# Altium PCB Keypadmacro.PcbDoc
Units mm, origin at the board's own origin, x right, y up, seen from the top; angles counter-clockwise.
Board outline 70 x 90 mm, 2 copper layers (F.Cu, B.Cu), stack 1.813 mm thick; 79 components, 70 nets, 291 pads, 67 vias.
Unrouted connection lines stored in the file: 94.
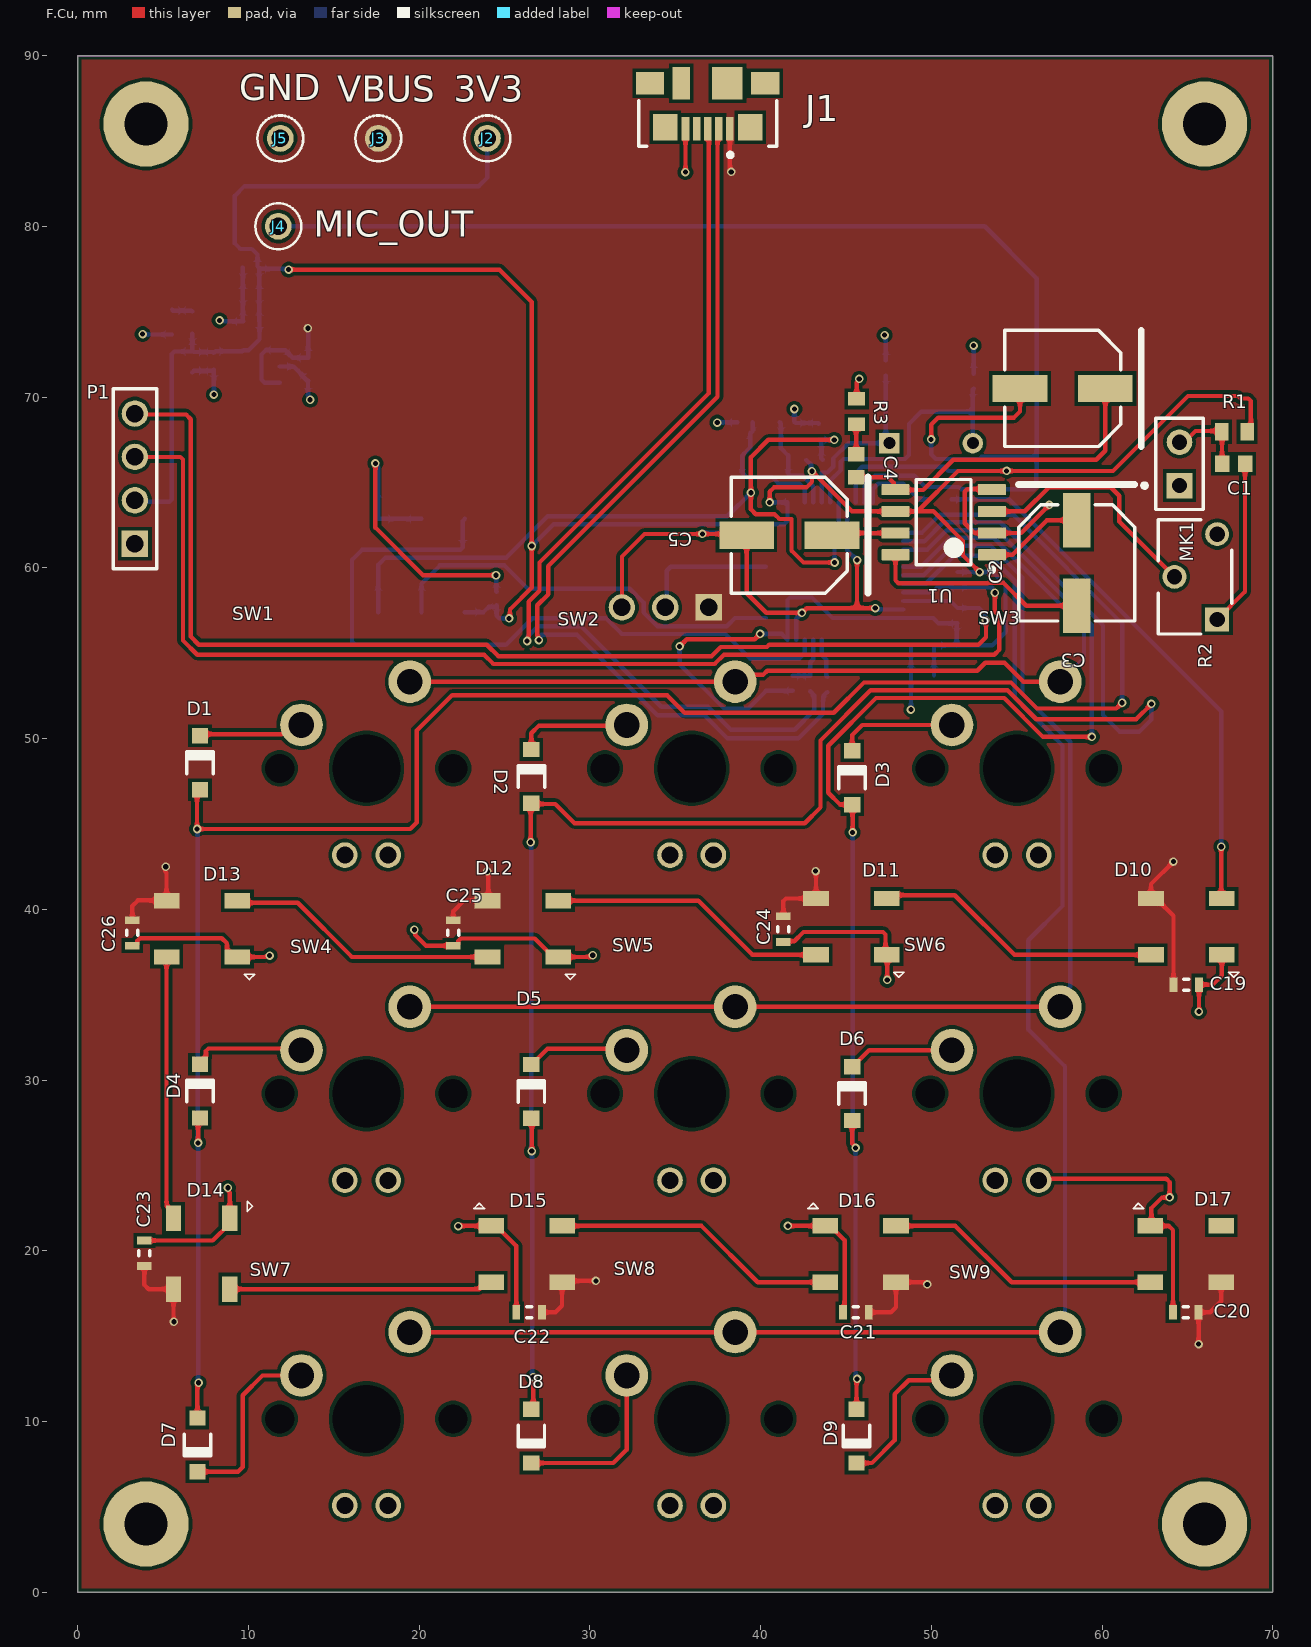
[diagram p0: F.Cu view]
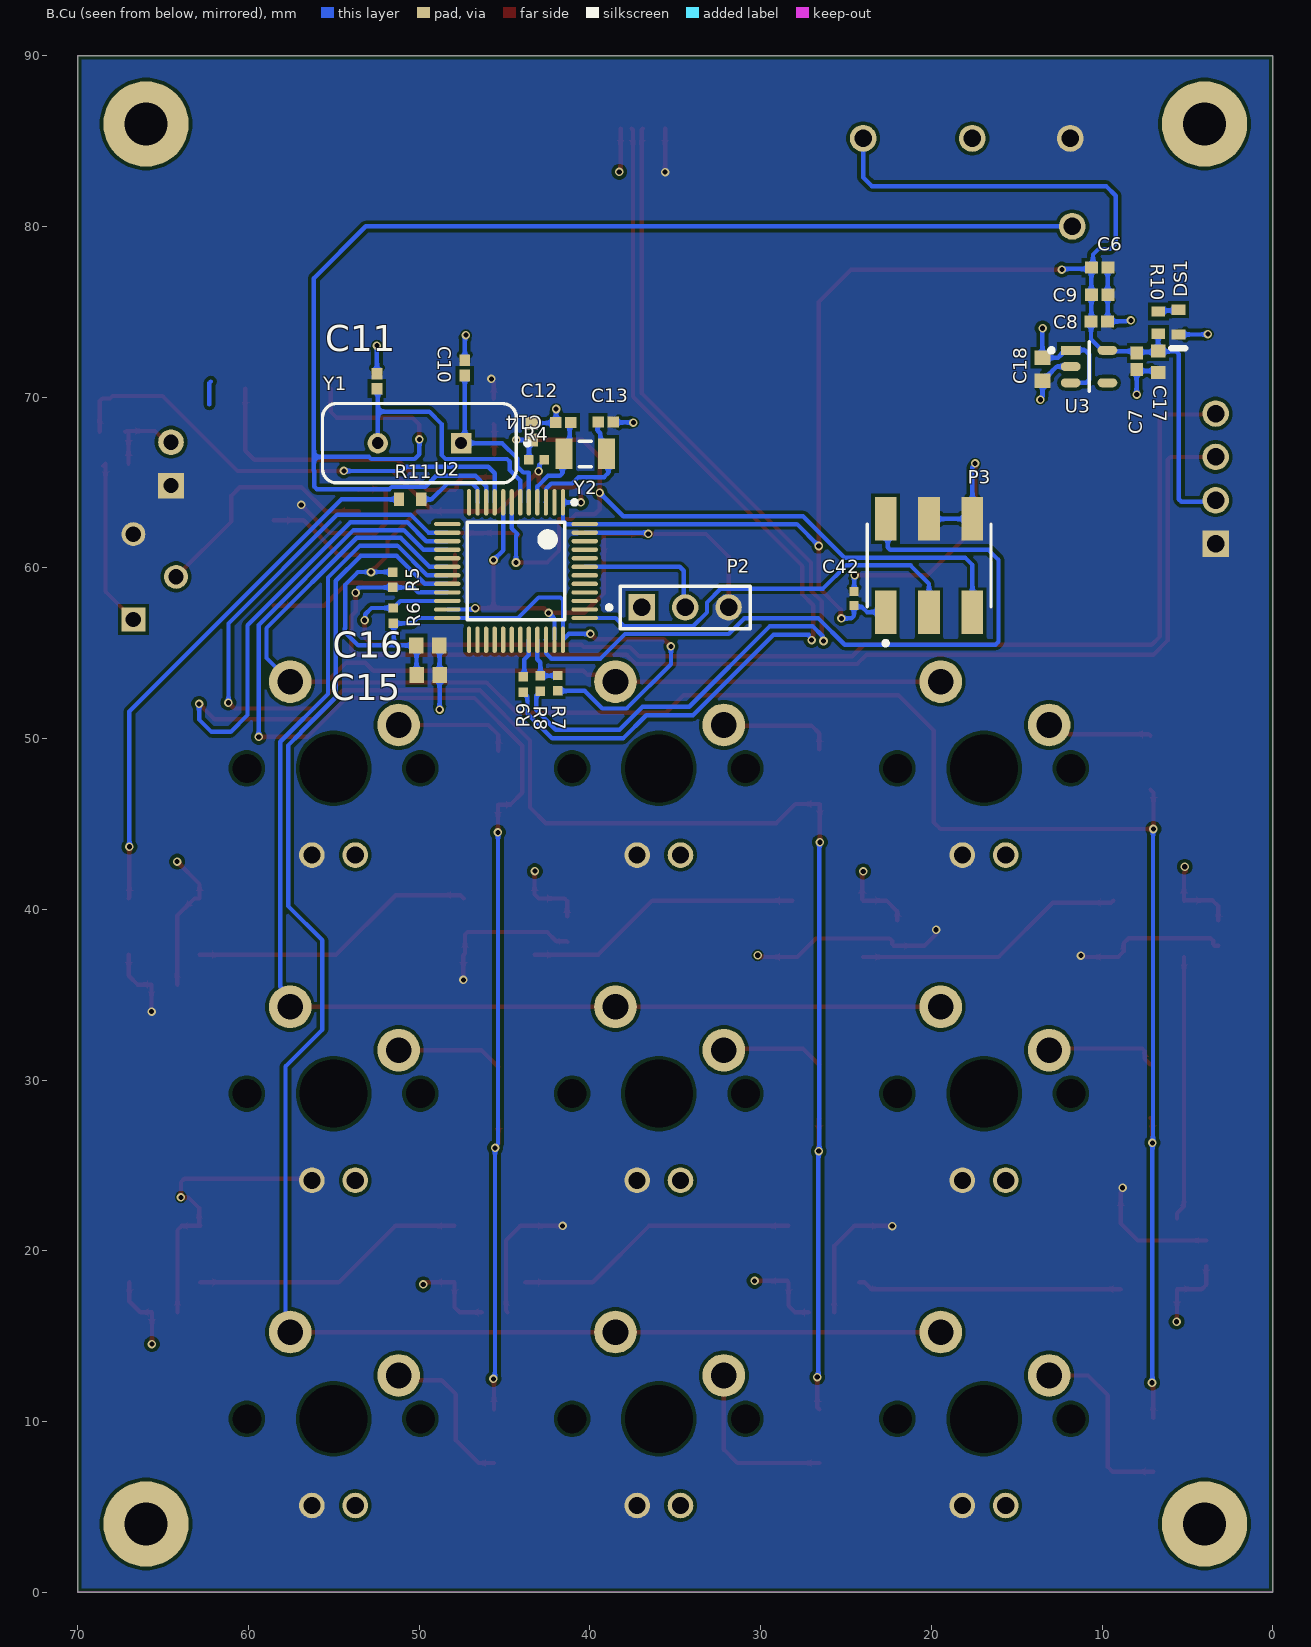
[diagram p1: B.Cu view, seen from below]
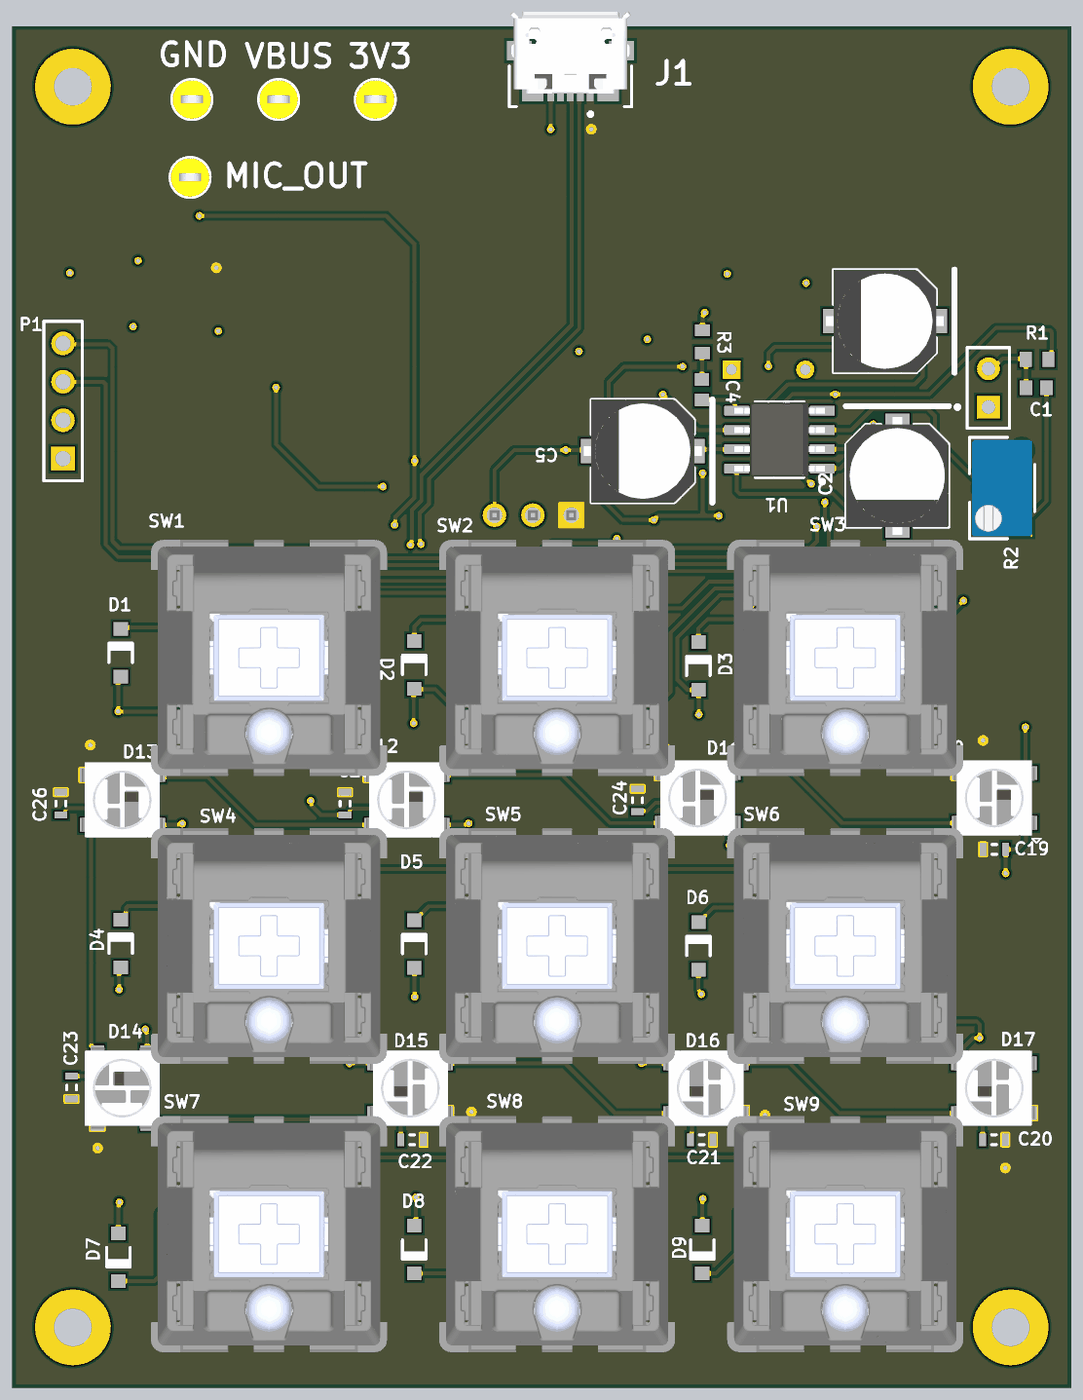
[diagram p2: 3D render of the assembled board from above, using the file's embedded part models]

## Layer stack, top to bottom
F.Mask: solder mask 0.0102, Solder Resist, Dk 3.5
F.Cu: signal copper 0.0356
Dielectric 2: prepreg 0.0711, PP-006, Dk 4.1
Dielectric 1: dielectric 1.6, FR-4, Dk 4.8
Dielectric 3: prepreg 0.0711, PP-006, Dk 4.1
B.Cu: signal copper 0.0356
B.Mask: solder mask 0.0102, Solder Resist, Dk 3.5

## Board outline
0,0 0,90 70,90 70,0 0,0

## Design rules (kind name [scope] priority, off if disabled: settings)
Clearance "Clearence 0.2_NetClass" [All] p1: gap=0.2 ignorepadtopadclearanceinfootprint=FALSE
DiffPairsRouting DiffPair_DiffPairsRouting [InDifferentialPairClass('STM32')] p1: maxlimit=0.254 minlimit=0.254 mostfreqgap=0.254 toplayer_minwidth=0.2 toplayer_maxwidth=0.381 toplayer_prefwidth=0.3 bottomlayer_minwidth=0.2 bottomlayer_maxwidth=0.381 bottomlayer_prefwidth=0.3 maxuncoupledlength=12.7
DiffPairsRouting [All] p2: maxlimit=0.254 minlimit=0.254 mostfreqgap=0.254 toplayer_minwidth=0.2 toplayer_maxwidth=0.381 toplayer_prefwidth=0.2 bottomlayer_minwidth=0.2 bottomlayer_maxwidth=0.381 bottomlayer_prefwidth=0.2 maxuncoupledlength=12.7
HoleSize "Hole Size (Default)" [All] p1: absolutevalues=TRUE maxlimit=10 minlimit=0.3 maxpercent=80.000 minpercent=20.000
MatchedLengths DiffPair_MatchedLengths [InDifferentialPairClass('STM32')] p1: tolerance=25.4 checknetsindiffpair=FALSE checkdiffpairvsdiffpair=TRUE checkxsignals=TRUE checkothers=TRUE
MinimumSolderMaskSliver [All] p1: minsoldermaskwidth=0
PolygonConnect [All] p1: connectstyle=Direct reliefconductorwidth=0.254 reliefentries=4 polygonreliefangle="90 Angle" airgapwidth=0.254
RoutingVias [All] p1: holewidth=0.3 width=0.5 viastyle="Through Hole" minholewidth=0.3 minwidth=0.5 maxholewidth=0.3 maxwidth=0.5
SilkToSilkClearance [All] p1: silktosilkclearance=0
SilkToSolderMaskClearance [IsPad] p1: minsilkscreentomaskgap=0 clearancetoexposedcopper=TRUE
SolderMaskExpansion [All] p1: expansion=0.102 istentingtop=FALSE
Width [All] p1: maxlimit=0.254 minlimit=0.254 preferedwidth=0.254
25 further rules are at their usual default settings.

## Classes and differential pairs
differential pair class STM32_P: D
differential pair class STM32_N: D
component class STM: C6 C7 C8 C9 C10 C11 C12 C13 C14 R4 R5 R6 R7 R8 R9 U2 Y1 Y2
component class LED: C19 C20 C21 C22 C23 C24 C25 C26 D10 D11 D12 D13 D14 D15 D16 D17 R11
component class Designator: D1 D2 D3 D4 D5 D6 D7 D8 D9 SW1 SW2 SW3 SW4 SW5 SW6 SW7 SW8 SW9
component class 3V3: C15 C16 C17 C18 DS1 R10 U3
component class Sound: C1 C2 C3 C4 C5 MK1 R1 R2 R3 U1
component class Keypadmacro: C42 J1 J2 J3 J4 J5 P1 P2 P3
differential pair D: +D_P -D_N

## Components (designator, comment, footprint, x,y, rotation, side; value= is the part's Value field where it differs from the comment)
C1 "GRM188R60J106ME47D" CAPC1608X90X35NL10T15 67.7,66.1 r0 top
C2 "EEEFP1V470AP" PNSC-FP-V-D_V 57.689,70.509 r180 top
C3 "EEEFP1V470AP" PNSC-FP-V-D_V 58.511,60.288 r270 top
C4 "GRM188R60J106ME47D" CAPC1608X90X35NL10T15 45.596,65.981 r270 top
C5 "EEEFP1V470AP" PNSC-FP-V-D_V 41.681,61.918 r180 top
C6 "10uF 0402" CAPC1005X55X30ML05T10 10.133,77.591 r0 bottom
C7 "10uF 0402" CAPC1005X55X30ML05T10 7.977,72.105 r90 bottom
C8 "10uF 0402" CAPC1005X55X30ML05T10 10.169,74.439 r0 bottom
C9 "10uF 0402" CAPC1005X55X30ML05T10 10.147,76.008 r0 bottom
C10 "20pF" CAPC1005X56X25NL10T15 47.329,71.712 r270 bottom
C11 "20pF" CAPC1005X56X25NL10T15 52.478,70.942 r270 bottom
C12 "10uF 0402" CAPC1005X55X30ML05T10 43.412,67.972 r270 bottom
C13 "20pF" CAPC1005X56X25NL10T15 39.081,68.536 r0 bottom
C14 "20pF" CAPC1005X56X25NL10T15 41.568,68.526 r180 bottom
C15 "10uF" CAPC1608X90X35NL10T15 49.478,53.72 r0 bottom
C16 "10uF" CAPC1608X90X35NL10T15 49.489,55.462 r0 bottom
C17 "1uF" CAPC1608X90X35LL10T15 6.712,72.079 r90 bottom
C18 "10uF" CAPC1608X90X35NL10T15 13.497,71.634 r90 bottom
C19 "100nF" CAPC1608X90X20LL10 64.93,35.593 r180 top
C20 "100nF" CAPC1608X90X20LL10 64.901,16.4 r0 top locked
C21 "100nF" CAPC1608X90X20LL10 45.579,16.4 r0 top
C22 "100nF" CAPC1608X90X20LL10 26.44,16.4 r0 top locked
C23 "100nF" CAPC1608X90X20LL10 3.906,19.857 r270 top
C24 "100nF" CAPC1608X90X20LL10 41.334,38.841 r90 top
C25 "100nF" CAPC1608X90X20LL10 21.994,38.62 r90 top
C26 "100nF" CAPC1608X90X20LL10 3.198,38.62 r90 top
C42 "CAP 10uF 4V 0402(1005)" CAPC0402(1005)60_L 24.536,58.207 r270 bottom value=10uF
D1 "1N4148W-7-F" DIOD-SOD123-2_V 7.161,48.586 r90 top locked
D2 "1N4148W-7-F" DIOD-SOD123-2_V 26.568,47.786 r90 top
D3 "1N4148W-7-F" DIOD-SOD123-2_V 45.362,47.708 r90 top locked
D4 "1N4148W-7-F" DIOD-SOD123-2_V 7.161,29.358 r90 top locked
D5 "1N4148W-7-F" DIOD-SOD123-2_V 26.568,29.335 r90 top
D6 "1N4148W-7-F" DIOD-SOD123-2_V 45.362,29.21 r90 top locked
D7 "1N4148W-7-F" DIOD-SOD123-2_V 7.008,8.636 r270 top
D8 "1N4148W-7-F" DIOD-SOD123-2_V 26.566,9.144 r270 top
D9 "1N4148W-7-F" DIOD-SOD123-2_V 45.616,9.144 r270 top
D10 "WS2182B ADD LED 3.3V-5V" WS2182B 64.92,38.987 r0 top locked
D11 "WS2182B ADD LED 3.3V-5V" WS2182B 45.302,38.987 r0 top locked
D12 "WS2182B ADD LED 3.3V-5V" WS2182B 26.058,38.862 r0 top locked
D13 "WS2182B ADD LED 3.3V-5V" WS2182B 7.262,38.862 r0 top locked
D14 "WS2182B ADD LED 3.3V-5V" WS2182B 7.262,19.812 r90 top locked
D15 "WS2182B ADD LED 3.3V-5V" WS2182B 26.312,19.812 r180 top locked
D16 "WS2182B ADD LED 3.3V-5V" WS2182B 45.87,19.812 r180 top locked
D17 "WS2182B ADD LED 3.3V-5V" WS2182B 64.92,19.812 r180 top locked
DS1 "TLMS1000-GS08" VISH-TLMS1000_V 5.525,74.396 r270 bottom
J1 "473460001" FP-473460001-MFG 36.899,88.038 r180 top
J2 "5004" FP-5004-MFG 23.994,85.159 r0 top
J3 "5004" FP-5004-MFG 17.606,85.159 r0 top
J4 "5004" FP-5004-MFG 11.751,80.006 r0 top
J5 "5004" FP-5004-MFG 11.866,85.159 r0 top
MK1 "Mic2" PIN2 64.534,64.823 r90 top
P1 "TSW-104-08-T-S" SMTC-TSW-104-08-X-S 3.348,61.419 r90 top
P2 "22-28-4033" MOLX-22-28-4033_V 34.416,57.685 r180 bottom
P3 "95278-101A06LF" AMPM-95278-101A06LF_V 20.137,60.142 r180 bottom
R1 "RT0603DRE0710KL" RESC1608X55X25ML10T15 67.75,67.975 r0 top
R2 "PV37W101C01B00" FP-PV37W101C01B00-MFG 65.44,59.477 r270 top
R3 "RT0603DRE0710KL" RESC1608X55X25ML10T15 45.627,69.155 r270 top
R4 "10K" RESC1005X40X25NL05T05 43.125,66.325 r180 bottom
R5 "10K" RESC1005X40X25NL05T05 51.552,59.306 r90 bottom
R6 "10K" RESC1005X40X25NL05T05 51.528,57.202 r270 bottom
R7 "10K" RESC1005X40X25NL05T05 41.879,53.246 r270 bottom
R8 "100R" RESC1005X40X25NL05T05 42.9,53.225 r270 bottom
R9 "100R" RESC1005X40X25NL05T05 43.9,53.175 r270 bottom
R10 "470R" RESC1608X55X25LL10T15 6.706,74.368 r90 bottom
R11 "100R" RESC1608X55X25LL10T15 50.525,64.017 r0 bottom
SW1 "Cherry MX with an LED" MX_Cherry_LED 16.914,48.26 r0 top
SW2 "Cherry MX with an LED" MX_Cherry_LED 35.964,48.26 r0 top
SW3 "Cherry MX with an LED" MX_Cherry_LED 55.014,48.26 r0 top locked
SW4 "Cherry MX with an LED" MX_Cherry_LED 16.914,29.21 r0 top
SW5 "Cherry MX with an LED" MX_Cherry_LED 35.964,29.21 r0 top
SW6 "Cherry MX with an LED" MX_Cherry_LED 55.014,29.21 r0 top
SW7 "Cherry MX with an LED" MX_Cherry_LED 16.914,10.16 r0 top
SW8 "Cherry MX with an LED" MX_Cherry_LED 35.964,10.16 r0 top
SW9 "Cherry MX with an LED" MX_Cherry_LED 55.014,10.16 r0 top
U1 "LM386M-1" D0008A_M 50.722,62.677 r180 top locked
U2 "STM32F103C8T6" STM-LQFP48_L 44.328,59.816 r270 bottom
U3 "MIC5219-3.3YM5-TR" FP-SOT23-5LD-PL-1-IPC_C 10.763,71.793 r180 bottom
Y1 "FOXSLF/080-20" FOX-FOXSLF080-20 49.986,67.305 r0 bottom locked
Y2 "ABS07-120-32.768KHZ-T" ABRA-ABS07_A_V 40.27,66.679 r0 bottom

## Footprints (in the part's own frame and the unit in brackets; to place one, negate y for a bottom-side part, rotate by r counter-clockwise, add the part's x,y. Pads: shape width x height; smd on the part's side, far side on the other; paste and mask are expansions set on the pad)
ABRA-ABS07_A_V [mm] "SMD, 2-Leads, Body 3.2x1.5mm"
  rect 1x1.8 smd: 1(-1.25,0) 2(1.25,0)
  silkscreen extent -0.35,-0.75 0.35,0.75, body extent -1.6,-0.75 1.6,0.75, height 0.9
AMPM-95278-101A06LF_V [mm] "SMD, 6-Leads, Body 7.26x4.83mm, Pitch 2.54mm"
  rect 1.27x2.54 smd: 1(-2.54,-2.73) 2(-2.54,2.73) 3(0,-2.73) 4(0,2.73) 5(2.54,-2.73) 6(2.54,2.73)
  silkscreen extent -3.63,-4.67 3.63,2.41, body extent -3.61,-3.64 3.61,3.64, height 9.71
CAPC0402(1005)60_L [mm] "Chip Capacitor, Body 1.0x0.5mm, Height 0.6mm, IPC High Density"
  rect 0.52x0.52 smd: 1(-0.4,0) 2(0.4,0)
  body extent -0.55,-0.3 0.55,0.3, height 0.6
CAPC1005X55X30ML05T10 [mm] "Chip Capacitor, 2-Leads, Body 1.00x0.50mm, IPC Low Density"
  rect 0.76x0.72 smd: 1(-0.48,0) 2(0.48,0)
  body extent -0.53,-0.28 0.53,0.27, height 0.55
CAPC1005X56X25NL10T15 [mm] "Chip Capacitor, 2-Leads, Body 1.00x0.50mm, IPC Medium Density"
  rect 0.68x0.64 smd: 1(-0.44,0) 2(0.44,0)
  body extent -0.55,-0.3 0.55,0.3, height 0.56
CAPC1608X90X20LL10 [mm] "Chip Capacitor, 2-Leads, Body 1.70x0.90mm, IPC High Density"
  rect 0.45x0.85 smd: 1(-0.75,0) 2(0.75,0)
  silkscreen extent -0.15,-0.33 0.15,0.33, body extent -0.85,-0.45 0.85,0.45, height 0.9
CAPC1608X90X35LL10T15 [mm] "Chip Capacitor, 2-Leads, Body 1.60x0.80mm, IPC High Density"
  rect 0.75x0.85 smd: 1(-0.625,0) 2(0.625,0)
  body extent -0.85,-0.45 0.85,0.45, height 0.9
CAPC1608X90X35NL10T15 [mm] "Chip Capacitor, 2-Leads, Body 1.60x0.80mm, IPC Medium Density"
  rect 0.85x0.95 smd: 1(-0.675,0) 2(0.675,0)
  body extent -0.85,-0.45 0.85,0.45, height 0.9
D0008A_M [mm] "SOIC, 8-Leads, Body 5x4mm, Pitch 1.27mm, IPC Low Density"
  rrect15% 1.65x0.65 smd: 1(-2.825,1.905) 2(-2.825,0.635) 3(-2.825,-0.635) 4(-2.825,-1.905) 5(2.825,-1.905) 6(2.825,-0.635) 7(2.825,0.635) 8(2.825,1.905)
  silkscreen extent -2.95,-2.5 1.6,2.9, body extent -3,-2.45 3,2.45, height 1.63
DIOD-SOD123-2_V [mm] "SOD123, 2-Leads, Body 2.7x1.55mm, Height 1.45mm"
  rect 0.9x0.95 smd: 1(-1.575,0) 2(1.575,0)
  silkscreen extent -0.64,-0.82 0.64,0.77, body extent -1.35,-0.77 1.35,0.77, height 1.45
FOX-FOXSLF080-20 [mm] "THD, 2-Leads, Body 11.35x4.65mm"
  rect 1.2x1.2 hole 0.7: 1(-2.44,0)
  round 1.2 hole 0.7: 2(2.44,0)
  silkscreen extent -6.45,-2.33 5.68,2.32, body extent -5.67,-2.32 5.68,2.33, height 3.6
FP-5004-MFG [mm]
  round 1.57 hole 1.02 paste-1000 mask+0: 1(0,0)
  silkscreen extent -1.35,-1.34 1.35,1.34, body extent -1.45,-1.45 1.45,1.45, height 0.25
FP-473460001-MFG [mm]
  rect 0.45x1.38 smd paste+0 mask+0: 1(-1.3,2.31) 2(-0.65,2.31) 3(0,2.31) 4(0.65,2.31) 5(1.3,2.31)
  rect 1.425x1.55 smd paste+0 mask+0: 6(-2.488,2.225) 7(2.488,2.225)
  rect 1.65x1.3 smd paste+0 mask+0: 8(-3.375,-0.35) 11(3.375,-0.35)
  rect 1.8x1.9 smd paste+0 mask+0: 9(-1.15,-0.35)
  rect 1x1.9 smd paste+0 mask+0: 10(1.55,-0.35)
  silkscreen extent -4.05,0.67 4.05,3.97, body extent -4.3,-2.48 4.3,3.45, height 0.25
FP-PV37W101C01B00-MFG [mm]
  rect 1.4x1.4 hole 0.9 paste-1000 mask+0: 1(2.5,1.3)
  round 1.4 hole 0.9 paste-1000 mask+0: 2(0,-1.2) 3(-2.5,1.3)
  silkscreen extent -3.35,-2.15 3.35,2.15, body extent -3.2,-2 3.2,2, height 8.3
FP-SOT23-5LD-PL-1-IPC_C [mm]
  rect 1.156x0.53 smd paste+0 mask+0: 1(-1.075,0.95)
  rrect100% 1.156x0.53 smd paste+0 mask+0: 2(-1.075,0) 3(-1.075,-0.95) 4(1.075,-0.95) 5(1.075,0.95)
  silkscreen extent -2.33,-1.45 0,1.45, body extent -1.4,-1.45 1.4,1.45, height 1.45
MOLX-22-28-4033_V [mm] "THD, 3-Leads, Body 7.62x2.49mm, Pitch 2.54mm"
  rect 1.55x1.55 hole 1.02: 1(-2.54,0)
  round 1.55 hole 1.02: 2(0,0) 3(2.54,0)
  silkscreen extent -4.59,-1.24 3.81,1.24, body extent -3.81,-1.24 3.81,1.24, height 8.38
MX_Cherry_LED [mm] "Cherry Key Pad with LED"
  round 2.5 hole 1.5: 1(2.54,5.08) 2(-3.81,2.54)
  round 1.5 hole 1: 3(-1.27,-5.08) 4(1.27,-5.08)
  round 0 hole 1.702: 6(-5.08,0) 6(5.08,0)
  round 0 hole 3.988: Hole(0,0)
  body extent -7.75,-7.8 7.85,7.8, height 14.9
PIN2 [mm] "Photosensitive Diode; 2 Leads"
  rect 1.5x1.5 hole 0.9: 1(0,0)
  round 1.5 hole 0.9: 2(2.54,0)
  silkscreen extent -1.4,-1.4 3.94,2.17
PNSC-FP-V-D_V [mm] "CAPAE, 2-Leads, Body 6.80x6.80mm"
  rect 3.2x1.6 smd: 1(-2.5,0) 2(2.5,0)
  silkscreen extent -4.6,-3.4 3.4,3.4, body extent -3.9,-3.4 3.9,3.4, height 6.1
RESC1005X40X25NL05T05 [mm] "Chip Resistor, 2-Leads, Body 1.00x0.50mm, IPC Medium Density"
  rect 0.55x0.55 smd: 1(-0.45,0) 2(0.45,0)
  body extent -0.53,-0.27 0.53,0.28, height 0.4
RESC1608X55X25LL10T15 [mm] "Chip Resistor, 2-Leads, Body 1.70x0.90mm, IPC High Density"
  rect 0.6x0.8 smd: 1(-0.65,0) 2(0.65,0)
  body extent -0.85,-0.45 0.85,0.45, height 0.55
RESC1608X55X25ML10T15 [mm] "Chip Resistor, 2-Leads, Body 1.60x0.80mm, IPC Low Density"
  rect 0.8x1 smd: 1(-0.75,0) 2(0.75,0)
  body extent -0.85,-0.45 0.85,0.45, height 0.55
SMTC-TSW-104-08-X-S [mm] ".025 SQ Post Terminal Strip Assembly, 1x4 Pins, Vertical, 2.54mm Pitch, Male"
  rect 1.55x1.55 hole 1.02: 1(0,0)
  round 1.55 hole 1.02: 2(2.54,0) 3(5.08,0) 4(7.62,0)
  silkscreen extent -1.46,-1.27 9.08,1.27
STM-LQFP48_L [mm] "QFP, 48-Leads, Body 7x7mm, Pitch 0.5mm, IPC High Density"
  oval 1.55x0.25 smd: 1(-4.025,2.75) 2(-4.025,2.25) 3(-4.025,1.75) 4(-4.025,1.25) 5(-4.025,0.75) 6(-4.025,0.25) 7(-4.025,-0.25) 8(-4.025,-0.75) 9(-4.025,-1.25) 10(-4.025,-1.75) 11(-4.025,-2.25) 12(-4.025,-2.75) 25(4.025,-2.75) 26(4.025,-2.25) 27(4.025,-1.75) 28(4.025,-1.25) 29(4.025,-0.75) 30(4.025,-0.25) 31(4.025,0.25) 32(4.025,0.75) 33(4.025,1.25) 34(4.025,1.75) 35(4.025,2.25) 36(4.025,2.75)
  oval 0.25x1.55 smd: 13(-2.75,-4.025) 14(-2.25,-4.025) 15(-1.75,-4.025) 16(-1.25,-4.025) 17(-0.75,-4.025) 18(-0.25,-4.025) 19(0.25,-4.025) 20(0.75,-4.025) 21(1.25,-4.025) 22(1.75,-4.025) 23(2.25,-4.025) 24(2.75,-4.025) 37(2.75,4.025) 38(2.25,4.025) 39(1.75,4.025) 40(1.25,4.025) 41(0.75,4.025) 42(0.25,4.025) 43(-0.25,4.025) 44(-0.75,4.025) 45(-1.25,4.025) 46(-1.75,4.025) 47(-2.25,4.025) 48(-2.75,4.025)
  silkscreen extent -4.15,-2.85 2.85,3.55, body extent -3.5,-3.5 3.5,3.5, height 1.6
VISH-TLMS1000_V [mm] "SMD, 2-Leads, Body 0.8x1.6mm"
  rect 0.6x0.8 smd: 1(-0.725,0) 2(0.725,0)
  silkscreen extent 1.52,-0.4 1.52,0.4, body extent -0.8,-0.4 0.8,0.4, height 0.65
WS2182B [mm]
  rect 1.5x0.9 smd: 1(-2.058,1.651) 2(-2.058,-1.649) 3(2.092,-1.649) 4(2.092,1.651)
  silkscreen extent 2.49,-2.97 3.1,-2.67, body extent -2.68,-2.47 2.68,2.47, height 1.7

## Part data
C1 C4: library part CMP-2006-02792-1, Manufacturer=Murata, Part Number=GRM188R60J106ME47D
C2 C3 C5: library part CMP-2000-06216-1, "Aluminum Electrolytic Capacitor, 47 uF, +/- 20%, 35 V, 2-Pin SMD (Size Code D), -55 to 105 degC, RoHS, Tape and Reel", Capacitance=47µF, Case Size/Dimension=Ø6.3x5.8mm, ESR (Equivalent Series Resistance)=0.26O, Lifetime@Temperature=2000Hrs@105°C, Manufacturer=Panasonic, Operating Temp Range=-55to+105°C, Operating Temp-Max=105°C, Package Description="2-Pin Electrolytic Aluminum Capacitor, Body 6.6 x 6.6 mm", Package Reference=FP-V-D, Rated Voltage=35V, Ripple Current=300mA, Datasheet URL=http://industrial.panasonic.com/cdbs/www-data/pdf/RDE0000/ABA0000C1184.pdf, Datasheet Version=03/2016, Manufacturer URL=http://www.panasonic.com/, Mounting Technology=SurfaceMount, Package URL=http://industrial.panasonic.com/cdbs/www-data/pdf/RDE0000/DME0000COL48.pdf, Series=FP, Type=Can
C6 C7 C8 C9 C12: library part CMP-2008-03080-1, Manufacturer=Kemet, Part Number=C0402C104J4RACTU
C10 C11 C13 C14: library part CMP-2008-02607-1, Manufacturer="AVX Interconnect / Elco", Part Number=04025A200JAT2A
C15 C16 C18: library part CMP-2006-02792-1, Manufacturer=Murata, Part Number=GRM188R60J106ME47D
C17: library part CMP-2006-02459-1, Manufacturer=Murata, Part Number=GRM188R61E105KA12D
C19 C20 C21 C22 C23 C24 C25 C26: library part CMP-2000-07546-1, "Chip Capacitor, 0.1 uF, +/- 10%, 50 V, -55 to 125 degC, 0603 (1608 Metric), RoHS, Tape and Reel", Case Code (Imperial)=0603, Case Code (Metric)=1608, Dielectric=X7R, Manufacturer=TDK, Max Operating Temperature=125degC, Min Operating Temperature=-55degC, Package Description="2-Pin Surface Mount Device, Body 1.6 x 0.8 mm", Package Quantity=1, Package Reference=603, Tolerance=10%, Voltage=50V, Capacitance=100nF, Case/Package=0603, Composition=Ceramic, Datasheet URL=https://product.tdk.com/info/en/catalog/datasheets/mlcc_automotive_general_en.pdf, Datasheet Version=12/2014, Depth=0.8mm, Height=0.8mm, Lead Free=LeadFree, Length=1.6mm, Manufacturer URL=http://www.tdk.com/, Mount=SurfaceMount, Mounting Technology=SurfaceMount, Packaging=TapeandReel, Radiation Hardening=No, REACH SVHC=NoSVHC, RoHSCompliant=True, Termination=SMD/SMT, Thickness=0.035inch, Voltage Rating=50V, Voltage Rating (DC)=50V, Weight=7.1E-05oz, Width=0.8mm
C42: library part CMP-1034-02139-1, "CAP 10uF 4V ±20% 0402 (1005 Metric) Thickness 0.6mm SMD", Case-EIA=0402, Case-Metric=1005, Rated Voltage="4 V", Tolerance=Â±20%, Max Thickness="0.6 mm", Technology=SMT
D1 D2 D3 D4 D5 D6 D7 D8 D9: library part "Diode 1N4148", "High Conductance Fast Diode", Code_JEDEC=DO-204-AH, ComponentLink1Description="Manufacturer Link", ComponentLink1URL=http://www.fairchildsemi.com/, ComponentLink2Description=Datasheet, ComponentLink2URL=http://www.fairchildsemi.com/ds/1N%2F1N4148.pdf, DatasheetVersion=1997, LatestRevisionDate=17-Jul-2002, LatestRevisionNote="Re-released for DXP Platform.", PackageDescription="Diode, Axial; Body 3.8 x 1.9 mm (LxDia. max), Lead Dia. 0.53 mm (max)", PackageReference=DO-35, Published=8-Jun-2000, Publisher="Altium Limited"
D10 D11 D12 D13 D14 D15 D16 D17: library part WS2182B
DS1: library part CMP-2000-07254-1, "Low Current LED, 40 mW, 1.8 V, -40 to 100 degC, 2-Pin SMD (0603), RoHS, Tape and Reel", Forward Current If=2mA, Forward Voltage=1.8V, LED Colour=Red, Manufacturer=Vishay, Package Description="2-Pin Surface Mount Device, Body 1.6 x 0.8 mm", Package Reference=TLMS1000, Automotive Qualification Standard=AEC-Q100, Bulb Size=1.6mmx0.8mm, Datasheet URL=https://datasheet.ciiva.com/5798/1698881-5798337.pdf, Datasheet Version="Rev. 1.7, 02/2011", LED Mounting=SMD, Lens Shape=Rectangular, Luminous Intensity=4mcd, Manufacturer URL=http://www.vishay.com/, Mounting Technology=SurfaceMount, MSL=MSL2-1year, Packaging=CutTape, Product Range=-, SVHC=ToBeAdvised, Viewing Angle=80°, Wavelength Typ=636nm
J1: library part CMP-2000-05246-2, "CONN RCPT USB2.0 MICRO B SMD R/A", Current Rating=1.8A, Manufacturer=Molex, Package=0, Temperature="-30°C to +85°C", Temperature Range High=+85°C, Temperature Range Low=-30°C, Voltage Rating=30V, Automotive=No, Category=Conn, ComponentLink2Description=Datasheet, ComponentLink2URL=https://www.molex.com/webdocs/datasheets/pdf/en-us/0473460001_IO_CONNECTORS.pdf, Conn Orientation="Right Angle", Contact Material=Gold,Nickel, Device Class L1=Connectors, Device Class L2="USB Connectors", Device Class L3=unset, Digikey Description="CONN RCPT USB2.0 MICRO B SMD R/A", Footprint Url=https://www.molex.com/pdm_docs/sd/473460001_sd.pdf, Height=2.945mm, Is Female=yes, Lead Free=Yes, Manufacturer Part Number=473460001, Number Of Contacts=5, Octopart=https://octopart.com/47346-0001-molex-7164928, Pitch=0.65mm, RoHS=TRUE, Shielding=true, Usb Standard="USB 2.0"
J2 J3 J4 J5: library part CMP-2000-05575-2, "PC TEST POINT MINIATURE YELLOW", Manufacturer=Keystone, Automotive=No, Category=Conn, ComponentLink2Description=Datasheet, ComponentLink2URL=https://www.keyelco.com/product-pdf.cfm?p=1313, Contact Material=Silver, Device Class L1=Connectors, Device Class L2=unset, Device Class L3=unset, Digikey Description="PC TEST POINT MINIATURE YELLOW", Height=4.72mm, Is Female=yes, Lead Free=Yes, Manufacturer Part Number=5004, Mouser Description="TEST POINT PC MINI .040\"D YELLOW", Number Of Contacts=1, Octopart=https://octopart.com/5004-keystone-28591, Package=5004, RoHS=TRUE
MK1: "Microphone", LatestRevisionDate=17-Jul-2002, LatestRevisionNote="Re-released for DXP Platform.", PackageReference=PIN2, Published=24-Mar-1999, Publisher="Altium Limited"
P1: library part CMP-1024-00356-1, "0.025\" SQ Post Header, Through-hole, Vertical, -55 to 105 degC, 2.54 mm Pitch, 4-Pin, Male, RoHS", Manufacturer=Samtec, Temperature Range="-55 to 105 degC", ComponentLink1Description="Manufacturer URL", ComponentLink1URL=http://www.samtec.com, ComponentLink2Description=Datasheet, ComponentLink2URL=http://www.samtec.com/documents/webfiles/pdf/TSW_TH.PDF, ComponentLink3Description="Package Specification", ComponentLink3URL=http://www.samtec.com/documents/webfiles/cpdf/TSW-XXX-XX-XXX-X-XX-XXX-MKT.pdf, DatasheetVersion=F-214, Mounting Technology=Through-hole, Orientation=Vertical, PackageDescription=".025[0.64] SQ. Post Terminal Strip Assembly", PackageReference=TSW-104-08-X-S, PackageVersion="DM, 8/1988", PartNumber=TSW-104-08-T-S, Pitch="2.54 mm", RoHS=True
P2: library part CMP-1676-00001-5, "Male Header, Pitch 2.54 mm, 1 x 3 Position, Height 8.38 mm, Tail Length 3.18 mm, RoHS, Bulk", Colour=Black, Current Rating="4 A", Manufacturer=Molex, Max Operating Temperature="75 degC", Min Operating Temperature="0 degC", Package Quantity=1, Voltage Rating="250 V", ComponentLink1Description="Manufacturer URL", ComponentLink1URL=http://www.molex.com/, ComponentLink2Description=Datasheet, ComponentLink2URL=http://www.molex.com/pdm_docs/sd/022284033_sd.pdf, Contact Finish=Gold, Contact Material=Brass, Contact Plating=Gold, DatasheetVersion="Rev. G, 01/2012", Height="8.38 mm", Lead Pitch="0.1 inch", Length="7.62 mm", Mount="Through Hole", Mounting Technology="Through Hole", PackageDescription="Male Header, Pitch 2.54 mm, 1 x 3 Position, Height 8.38 mm, Tail Length 3.18 mm", PackageReference=22-28-4033, Packaging=Bulk, Pins=3, REACH SVHC=Unknown, RoHSCompliant=true, Rows=1
P3: library part CMP-1743-00002-1, "Male Header, Pitch 2.54 mm, 2 x 3 Position, Height 14.4 mm, RoHS, Tape and Reel", Case Code (Imperial)=0603, Case Code (Metric)=1608, Max Operating Temperature="155 degC", Min Operating Temperature="-55 degC", Power Rating="100 mW", Resistance="49.9 Ohm", Tolerance=1%, Voltage Rating="50 V", Case\Package=0603, ComponentLink1Description=Datasheet, ComponentLink1URL=http://portal.fciconnect.com/Comergent//fci/drawing/95278.pdf, DatasheetVersion="Rev. AC, 03/2016", Height="0.45 mm", Length="1.6 mm", Mount="Surface Mount", PackageDescription="Male Header, Pitch 2.54 mm, 2 x 3 Position, Height 14.4 mm", PackageReference=95278-101A06LF, Packaging="Tape and Reel", REACH SVHC="No SVHC", RoHSCompliant=true, Width="0.8 mm"
R1 R3: library part CMP-2000-04608-1, Manufacturer=Yageo, Part Number=RT0603DRE0710KL
R2: library part CMP-06028-000002-1, "TRIMMER 100 OHM 0.25W PC PIN TOP", Color=Grey, Max Operating Temperature=125°C, Max Power Dissipation=250mW, Min Operating Temperature=-55°C, Package Quantity=50, Resistance=100R, Temperature Coefficient=150ppm/°C, Tolerance=10%, Composition=Cermet, Height=0.264inch, Lead Free="Lead Free", Length=0.252inch, Mount="Through Hole", Number of Turns=12, Packaging=Bulk, Power Rating=250mW, Radiation Hardening=No, Taper=Linear, Termination="PC Pin", Weight=340mg, Width=0.157inch
R4 R5 R6 R7 R8 R9: library part CMP-2002-08523-1, Manufacturer="Vishay Dale", Part Number=CRCW0402330RFKED
R10 R11: library part CMP-1659-00035-1, "General Purpose Chip Resistor, 470 Ohm, +/- 1%, -55 to 155 degC, 0603 (1608 Metric), RoHS, Tape and Reel", Max Operating Temperature="90 degC", Min Operating Temperature="-40 degC", Package Quantity=2500, Resistance="50 Ohm", ComponentLink1Description="Manufacturer URL", ComponentLink1URL=http://www.yageo.com/, ComponentLink2Description=Datasheet, ComponentLink2URL=https://datasheet.ciiva.com/11808/0900766b80f96399-11808177.pdf, Contact Material=Brass, Contact Plating=Gold, DatasheetVersion="Rev. 4, 04/2009", Fastening Type=Snap, Height="1.25 mm", Impedance="50 Ohm", Length="3 mm", Mount="Surface Mount", PackageDescription="2-Pin Surface Mount Device, Body 1.6 x 0.8 mm", PackageReference=0603, Packaging="Tape and Reel", Radiation Hardening=No, RoHSCompliant=true, Width="3.1 mm"
SW1 SW2 SW3 SW4 SW5 SW6 SW7 SW8 SW9: library part MX_Cherry_LED
U1: library part CMP-0057-00421-3, "Low Voltage Audio Power Amplifier, 8-pin Narrow SOIC", Manufacturer="Texas Instruments", PackageTopMarking=NSZXTT*LM386*M-1, PowerWise=N, Code_IPC=SOIC127P600-8, Code_JEDEC=MS-012-AA, ComponentLink1Description="Datasheet URL", ComponentLink1URL=http://www.ti.com/general/docs/lit/getliterature.tsp?genericPartNumber=LM386&fileType=pdf, CompType="Audio IC", PackageDescription="SOIC Narrow, 4.9 x 3.9 x 1.45mm, 8 Lead, 1.27mm Pitch", PackageReference=D0008A, PinCount=8, RoHS=N
U2: library part CMP-0237-00215-3, "ARM Cortex-M3 32-bit MCU, 64 KB Flash, 20 KB Internal RAM, 37 I/Os, 48-pin LQFP, -40 to 85 degC, Tray", I/Os (High Current)=37, Operating Frequency(F) (Processor speed) (MHz)=72, Supply Voltage(Vcc) min (V)=2, A/D Converter="2x12-bit (10 Channel)", ComponentLink1Description="Manufacturer URL", ComponentLink1URL=http://www.st.com/web/en/home.html, ComponentLink2Description=Datasheet, ComponentLink2URL=http://www.st.com/st-web-ui/static/active/en/resource/technical/document/datasheet/CD00161566.pdf, ComponentLink3Description="Package Specification", ComponentLink3URL=http://www.st.com/st-web-ui/static/active/en/resource/technical/document/datasheet/DM00058181.pdf, Core="ARM Cortex-M3", DatasheetVersion="Rev. 16", FLASH Size (Prog) (kB)=64, Internal RAM Size (kB)=20, Mounting Technology="Surface Mount", PackageDescription="48-Pin Low Profile Quad Flat Package, 7 x 7 mm Body, 0.5 mm Pitch", PackageReference=LQFP48, PackageVersion="Rev. 6, 06/2013", Packing=Tray, PartNumber=STM32F103C8T6
U3: library part CMP-06324-000027-1, "IC REG LINEAR 3.3V 500MA SOT23-5", Case/Package=SOT-23-5, Dropout Voltage=350mV, Max Input Voltage=12V, Max Operating Temperature=125°C, Min Input Voltage=2.5V, Min Operating Temperature=-40°C, Nominal Output Voltage=3.3V, Output Current=500mA, Lead Free="Lead Free", Mount="Surface Mount", Number of Pins=5, Number of Regulators=1, Output Type=Fixed, Output Voltage=3.3V, Packaging="Cut Tape", REACH SVHC="No SVHC"
Y1: library part CMP-1749-00002-1, "Resistance Weld Thru-Hole Crystal, 8 MHz, -20 to 70 degC, 2-Pin THD, RoHS, Bulk", Case\Package=TO-263-3, Dropout Voltage="2 V", Max Input Voltage="35 V", Max Operating Temperature="125 degC", Max Ouput Current="1 A", Min Input Voltage="7 V", Min Operating Temperature="0 degC", Nominal Output Voltage="5 V", Package Quantity=50, ComponentLink1Description="Manufacturer URL", ComponentLink1URL=http://www.foxonline.com/, ComponentLink2Description=Datasheet, ComponentLink2URL=http://download.siliconexpert.com/pdfs/2015/4/5/6/5/7/200/fox_/manual/35607121449963728hc49slf.pdf, DatasheetVersion=Mar-15, Height="30.02 mm", Length="10.24 mm", Mount="Surface Mount", Output Current="1 A", Output Voltage="5 V", Outputs=1, PackageDescription="2-Pin Through Hole Device, Body 11.35 x 4.65 mm", PackageReference=FOXSLF080-20, Packaging=Rail/Tube, Pins=3, Radiation Hardening=No, REACH SVHC="No SVHC", RoHSCompliant=true, Width="9.35 mm"
Y2: library part CMP-2000-07587-1, "Tuning Fork Crystal, 32.768 KHz, +/- 20 ppm, -40 to 85 degC, 2-Pin SMD, RoHS, Tape and Reel", Case\/Package=SMD/SMT, ESR (Equivalent Series Resistance)=55KOhm, Frequency=32.768KHz, Frequency Tolerance=20ppm, Load Capacitance=6pF, Manufacturer=Abracon, Max Operating Temperature=85degC, Min Operating Temperature=-40degC, Package Description="2-Pin Surface Mount Device, Body 3.2 x 1.5 mm", Package Quantity=3000, Package Reference=ABS07, Series Resistance=60KOhm, Datasheet URL=http://www.abracon.com/Resonators/ABS07-120-32.768kHz-T.pdf, Datasheet Version=11/2014, Depth=1.5mm, Height=0.035inch, Lead Free=LeadFree, Length=3.2mm, Manufacturer URL=http://www.abracon.com/, Mount=SurfaceMount, Mounting Technology=SurfaceMount, Number of Pins=2, Packaging=TapeandReel, Radiation Hardening=No, REACH SVHC=NoSVHC, RoHSCompliant=True, Termination=SMD/SMT, Tolerance=20ppm, Width=0.061inch

## Free pads (board coordinates)
  round 5 hole 2.5: 2(4,4) 2(4,86) 2(66,4) 2(66,86)

## Via types
v1: diameter 0.5, hole 0.3, F.Cu to B.Cu, 67 vias

## Nets (pads, with @x,y where several pads share a name; then routed paths per layer and width w, separated by ;. In a path a pad name is that pad's centre, name@x,y a point inside that pad or via, vN(x,y) a via of type N, cw(c..) or ccw(c..) an arc to the next point about the centre after c; other vN are vias at no path point)
+3.3V: C6.2 C7.2 C8.2 C9.2 C15.2 C16.2 C17.2 C42.2 J2.1 P1.2 P3.1 R1.2 R4.2 R5.2 R6.2 R7.2 R10.1 U1.6 U2.1 U2.9 U2.24 U2.36 U2.48 U3.5 | length 196.2
  F.Cu w0.254: v1(12.355,77.468) 24.704,77.468 26.593,75.579 v1(26.593,61.282) 26.593,58.847 25.317,57.571 25.317,57.091 v1(25.27,57.044) ; v1(35.255,55.403) 35.677,55.825 39.659,55.825 v1(39.968,56.134) ; v1(40.528,63.838) 40.533,63.844 40.533,64.469 40.78,64.716 42.683,64.716 43.006,65.039 v1(43.006,65.66) 45.354,63.312 U1.6 49.198,63.312 ; v1(52.821,59.756) 51.854,60.723 51.854,61.576 50.118,63.312 49.198,63.312 ; R1.2@68.715,67.974 68.715,69.773 68.566,69.921 68.106,69.921 67.96,70.067 65.029,70.067 60.639,65.677 v1(54.411,65.677) 51.563,65.677 49.198,63.312
  B.Cu w0.254: P1.2 3.433,63.874 5.356,63.874 5.505,64.023 5.505,72.527 5.654,72.676 6.684,72.676 C17.2 ; R10.1 6.712,73.712 C17.2 ; v1(12.355,77.468) 12.308,77.515 10.69,77.515 C6.2@10.631,77.574 ; P3.1 23.767,57.412 24.074,57.718 24.447,57.718 C42.2 24.536,57.193 24.685,57.044 v1(25.27,57.044) ; J2.1 23.994,82.863 23.493,82.362 9.766,82.362 9.206,81.803 9.206,79.005 9.528,78.683 10.203,78.683 10.532,78.354 10.532,77.672 C6.2 C6.2@10.631,77.574 ; v1(26.593,61.282) 27.876,62.566 U2.48 41.378,62.566 41.578,62.766 U2.1 41.576,63.838 v1(40.528,63.838) ; v1(35.255,55.403) 35.255,54.359 37.851,51.763 39.274,51.763 40.307,52.796 R7.2 ; v1(39.968,56.134) 41.235,56.134 U2.36 41.578,58.119 41.727,58.268 43.005,58.268 44.207,57.066 U2.24 50.107,57.066 50.422,56.752 R6.2 51.484,56.708 51.484,55.462 ; R4.2 42.959,66.041 42.959,65.707 v1(43.006,65.66) ; U2.9 45.578,65.55 45.951,65.924 50.745,65.924 50.991,65.677 v1(54.411,65.677) ; C15.2 50.153,55.451 C16.2 51.484,55.462 ; R5.2 v1(52.821,59.756) 53.589,59.756 54.338,59.007 54.338,56.484 54.36,56.462 54.36,56.251 53.57,55.462 51.484,55.462 ; C17.2 6.771,72.644 7.918,72.644 C7.2 8.083,72.69 9.635,72.69 U3.5 10,72.743 10.649,73.391 C8.2 10.631,74.456 10.631,76.008 C6.2@10.631,77.574
+BATT: C18.2 C19.2 C20.2 C21.2 C22.2 C23.2 C24.2 C25.2 C26.2 D10.1 D11.1 D12.1 D13.1 D14.1 D15.1 D16.1 D17.1 J1.1 J3.1 P2.1 U3.1 U3.3 | length 51.5
  F.Cu w0.254: C26.2 3.198,40.199 3.525,40.526 5.191,40.526 D13.1 5.204,42.137 5.108,42.234 5.109,42.235 5.109,42.446 v1(5.156,42.493) ; C23.2 3.906,18.006 4.158,17.754 D14.1 5.611,16.15 5.625,16.135 5.625,15.856 v1(5.636,15.845) ; C25.2 21.994,39.882 22.625,40.513 D12.1 24.049,40.562 24.049,42.026 24.034,42.041 24.034,42.178 v1(23.987,42.225) ; C22.2 27.983,16.4 28.37,16.787 D15.1 28.449,18.241 v1(30.354,18.241) ; J1.1 38.199,83.34 38.28,83.258 v1(38.28,83.192) ; C24.2 41.334,40.492 41.483,40.641 42.994,40.641 43.244,40.891 43.244,42.088 43.221,42.111 v1(43.221,42.237) ; C21.2 47.628,16.4 47.928,16.699 D16.1 49.568,18.161 49.695,18.034 v1(49.762,18.034) ; v1(64.176,42.794) 62.862,41.48 D10.1 63.162,40.638 64.18,39.621 C19.2 ; v1(65.654,14.536) 65.654,16.398 C20.2 66.337,16.4 66.978,17.04 D17.1
  B.Cu w0.254: U3.3 10.939,70.843 10.76,71.022 10.76,72.496 11.022,72.757 11.824,72.757 U3.1 12.151,72.743 12.585,72.309 C18.2 13.497,73.781 13.49,73.787 13.49,74.031 v1(13.484,74.038)
BOOT0: U2.44
CH_COL1: D3.1 D6.1 D9.1 U2.16 | length 79.6
  F.Cu w0.254: D6.1 45.362,26.288 45.558,26.092 v1(45.558,26.025) ; v1(45.386,44.504) 45.386,46.11 45.36,46.136 44.655,46.136 43.959,46.831 43.959,49.578 46.759,52.377 49.594,52.377 54.268,52.377 56.543,50.102 v1(59.399,50.102) ; D9.1 45.616,12.429 45.655,12.467 v1(45.655,12.5)
  B.Cu w0.254: v1(45.386,44.504) 45.386,26.264 45.558,26.092 v1(45.558,26.025) 45.558,12.596 v1(45.655,12.5) ; U2.16 49.751,61.066 50.9,62.215 53.843,62.215 59.399,56.658 v1(59.399,50.102)
CH_COL2: D2.1 D5.1 D8.1 U2.15 | length 105.3
  F.Cu w0.254: v1(26.531,43.929) 26.531,46.052 26.531,46.174 27.968,46.174 29.095,45.047 42.581,45.047 43.505,45.971 43.505,49.895 46.441,52.831 54.456,52.831 56.149,51.138 61.994,51.138 v1(62.888,52.032) ; D8.1 26.682,10.835 v1(26.682,12.605) ; D5.1 26.595,27.732 v1(26.595,25.837)
  B.Cu w0.254: v1(26.531,43.929) 26.563,43.897 26.563,25.869 v1(26.595,25.837) 26.595,25.772 26.617,25.75 26.617,12.671 v1(26.682,12.605) ; U2.15 49.59,61.566 50.692,62.669 54.031,62.669 60.055,56.644 60.055,51.382 61.042,50.395 62.161,50.395 62.888,51.123 v1(62.888,52.032)
CH_COL3: D1.1 D4.1 D7.1 U2.14 | length 121.5
  F.Cu w0.254: D7.1 7.008,12.204 v1(7.076,12.272) ; v1(7.054,26.325) 7.054,27.677 D4.1 ; D1.1 6.991,46.841 v1(6.991,44.706) 19.472,44.706 19.855,45.089 19.855,50.472 21.929,52.546 34.521,52.546 35.549,51.518 44.284,51.518 46.051,53.285 54.662,53.285 56.184,51.763 60.83,51.763 61.168,52.1 v1(61.172,52.1)
  B.Cu w0.254: v1(6.991,44.706) 7.023,44.675 7.023,26.356 v1(7.054,26.325) 7.054,12.295 v1(7.076,12.272) ; U2.14 48.355,62.068 49.45,62.068 50.504,63.123 54.798,63.123 61.172,56.748 v1(61.172,52.1)
CH_ROW1: SW1.1 SW2.1 SW3.1 U2.18 | length 56.2
  F.Cu w0.254: SW1.1 SW2.1 38.897,53.733 40.135,53.733 40.384,53.982 52.689,53.982 53.153,54.446 54.28,54.446 55.386,53.34 SW3.1
  B.Cu w0.254: U2.18 48.355,60.068 49.395,60.068 51.088,61.761 53.654,61.761 58.94,56.475 58.94,54.726 SW3.1
CH_ROW2: SW4.1 SW5.1 SW6.1 U2.19 | length 73.1
  F.Cu w0.254: SW4.1 SW5.1 SW6.1
  B.Cu w0.254: U2.19 49.535,59.566 51.276,61.307 53.466,61.307 55.336,59.437 55.336,52.611 58.131,49.816 58.131,35.475 57.554,34.898 SW6.1
CH_ROW3: SW7.1 SW8.1 SW9.1 U2.20 | length 92.9
  F.Cu w0.254: SW7.1 SW8.1 SW9.1
  B.Cu w0.254: U2.20 49.677,59.066 51.315,60.704 53.427,60.704 54.882,59.249 54.882,52.423 56.932,50.373 56.932,50.341 57.677,49.596 57.677,40.201 55.671,38.195 55.671,32.958 57.826,30.803 57.826,15.512 SW9.1
D_IN: R11.1 U2.11 | length 4.6
  B.Cu w0.254: U2.11 46.58,63.843 46.58,64.632 46.891,64.943 48.346,64.943 49.272,64.017 R11.1
D_N: J1.2 R9.2 | length 55.7
  F.Cu w0.254: v1(27.016,55.773) 26.969,55.82 26.969,55.994 26.921,56.042 26.921,57.814 27.555,58.448 27.555,60.105 37.478,70.028 37.478,85.657 J1.2
  B.Cu w0.254: v1(27.016,55.773) 27.016,55.839 27.164,55.988 27.164,56.082 29.248,56.082 33.966,51.364 36.706,51.364 38.055,50.015 42.206,50.015 43.654,51.463 43.654,52.479 R9.2
D_P: J1.3 R8.2 | length 56
  F.Cu w0.254: v1(26.318,55.718) 26.365,55.765 26.365,55.939 26.413,55.987 26.413,58.024 27.047,58.659 27.047,60.315 36.97,70.238 36.97,85.657 J1.3
  B.Cu w0.254: v1(26.318,55.718) 26.365,55.765 26.365,56.001 26.954,56.59 29.458,56.59 34.176,51.872 36.916,51.872 38.266,50.523 41.996,50.523 43.146,51.673 43.146,52.529 R8.2
DIN_EXT: P2.2 U2.43 | length 8.1
  B.Cu w0.254: P2.2 34.502,57.771 34.502,59.832 34.735,60.066 U2.43
GND: C5.2 C6.1 C7.1 C8.1 C9.1 C10.1 C11.1 C12.1 C13.1 C14.1 C15.1 C16.1 C17.1 C18.1 C19.1 C20.1 C21.1 C22.1 C23.1 C24.1 C25.1 C26.1 C42.1 D10.3 D11.3 D12.3 D13.3 D14.3 D15.3 D16.3 D17.3 DS1.2 J1.5 J5.1 MK1.1 P1.1 P2.3 P3.4 P3.6 R2.3 R3.1 SW1.4 SW2.4 SW3.4 SW4.4 SW5.4 SW6.4 SW7.4 SW8.4 SW9.4 U1.2 U1.4 U2.8 U2.23 U2.35 U2.47 U3.2 | length 165.5
  F.Cu w0.254: C26.1 3.398,37.87 3.496,37.968 3.496,38.161 3.645,38.31 8.441,38.31 8.739,38.013 8.739,37.536 9.062,37.213 D13.3 10.992,37.213 11.074,37.295 v1(11.238,37.295) ; C23.1 7.913,20.607 8.911,21.604 D14.3 8.911,23.405 8.844,23.472 8.844,23.649 v1(8.797,23.697) ; v1(17.434,66.126) 17.434,62.362 20.225,59.571 v1(24.5,59.571) ; v1(19.722,38.804) 19.769,38.757 19.769,38.498 20.397,37.87 C25.1 22.194,37.87 22.292,37.968 22.292,38.144 22.441,38.292 26.771,38.292 27.85,37.213 D12.3 30.068,37.213 v1(30.169,37.314) ; v1(22.288,21.445) 22.304,21.461 D15.3 24.52,21.461 25.69,20.291 C22.1 ; P2.3 31.876,60.668 33.196,61.989 v1(36.584,61.989) 39.111,61.989 C5.2 39.181,58.515 40.328,57.369 v1(42.419,57.369) 42.694,57.643 45.646,57.643 ; v1(35.593,83.18) 35.596,83.183 35.596,85.725 J1.5 ; C24.1 41.378,38.135 41.97,38.135 42.508,38.674 47.167,38.674 47.316,38.525 47.316,37.416 D11.3 47.414,37.318 v1(47.414,35.869) ; v1(41.595,21.46) v1(41.595,21.46) D16.3 44.078,21.461 44.919,20.619 44.919,16.491 C21.1 ; R3.1 45.627,70.858 45.775,71.006 v1(45.775,71.072) ; v1(45.646,60.458) 45.646,57.643 ; v1(46.715,57.643) 45.646,57.643 ; U1.4 53.515,64.614 52.105,64.614 51.956,64.466 51.956,62.613 52.527,62.042 55.265,62.042 v1(56.911,63.688) ; SW6.4 56.376,24.222 63.757,24.222 63.955,24.023 v1(63.955,23.127) 63.508,23.127 62.888,22.507 62.888,21.521 D17.3 63.902,21.461 64.151,21.212 C20.1 ; v1(65.675,34.011) 65.687,34.024 65.687,34.234 65.68,34.242 C19.1 66.491,35.593 67.012,36.114 D10.3
  B.Cu w0.254: v1(3.801,73.698) 3.828,73.671 DS1.2 ; C17.1 6.797,71.539 7.892,71.539 C7.1@7.975,71.623 ; v1(7.974,70.149) 7.975,70.151 C7.1@7.975,71.623 ; C7.1 C7.1@7.975,71.623 ; v1(8.312,74.5) 8.32,74.492 8.523,74.492 8.576,74.439 C8.1 9.671,74.456 9.671,77.574 C6.1 ; U3.2 12.651,71.793 13.149,71.295 13.149,71.257 13.447,70.959 C18.1 13.484,70.946 13.484,70.049 13.614,69.918 v1(13.614,69.852) ; v1(17.434,66.126) 17.434,66.059 17.597,65.896 P3.6 P3.4 ; v1(24.5,59.571) 24.518,59.553 24.518,58.625 C42.1 ; v1(30.169,37.314) v1@30.182,37.302 ; v1(36.584,61.989) 36.65,61.989 36.727,62.066 U2.47 ; v1(37.457,68.51) 37.47,68.523 38.628,68.523 C13.1 ; v1(41.978,69.308) 41.978,68.556 C14.1 42.045,68.489 43.375,68.489 C12.1 ; U2.35 42.078,57.027 v1(42.419,57.369) ; U2.8 45.078,61.026 v1(45.646,60.458) ; v1(46.715,57.643) 46.79,57.568 48.351,57.568 U2.23 ; v1(47.263,73.633) 47.263,73.567 47.329,73.501 C10.1 ; v1(48.803,51.704) C15.1 48.803,55.451 C16.1 ; v1(52.474,73.024) 52.476,73.022 52.476,71.384 C11.1 ; v1(63.955,23.127) v1@63.955,23.169
MIC_OUT_TO_CONTROLLER: C2.2 J4.1 U2.10 | length 84.5
  F.Cu w0.254: v1(49.986,67.527) 49.997,67.538 49.997,68.394 50.407,68.805 54.836,68.805 55.189,69.157 C2.2
  B.Cu w0.254: J4.1 53.131,80.006 56.166,76.972 56.166,66.504 ; U2.10 46.08,63.843 46.08,64.774 46.703,65.397 48.994,65.397 49.648,64.744 51.61,64.744 51.739,64.614 56.001,64.614 56.15,64.763 56.15,65.693 56.166,65.709 56.166,66.504 ; v1(49.986,67.527) 49.986,66.653 50.261,66.378 52.81,66.378 52.937,66.504 56.166,66.504
NetC1_1: C1.1 MK1.2 R1.1 | length 4.9
  F.Cu w0.254: MK1.2 64.813,67.363 65.473,68.024 67.165,68.024 R1.1@67.218,67.971 ; R1.1 67.025,67.95 C1.1
NetC1_2: C1.2 R2.1 | length 10
  F.Cu w0.254: R2.1 68.375,58.612 C1.2 C1.2@68.505,65.97
NetC2_1: C2.1 C4.2 U1.5 | length 19.7
  F.Cu w0.254: C4.2 47.472,65.306 47.798,64.98 47.798,64.682 U1.5 47.913,64.567 49.523,64.567 51.288,66.331 59.661,66.331 60.189,66.859 C2.1
NetC3_1: C3.1 U1.1 | length 5.8
  F.Cu w0.254: U1.1 54.75,60.772 56.766,62.788 C3.1
NetC3_2: C3.2 U1.8 | length 12.7
  F.Cu w0.254: U1.8 47.897,59.271 48.068,59.1 53.312,59.1 53.333,59.122 54.223,59.122 55.557,57.788 C3.2
NetC4_1: C4.1 R3.2 | length 1.8
  F.Cu w0.254: C4.1 45.596,68.373 R3.2
NetC5_1: C5.1 U1.7 | length 3.8
  F.Cu w0.254: C5.1 44.306,62.042 46.231,62.042 46.234,62.039 46.811,62.039 46.814,62.042 U1.7
NetD1_2: D1.2 SW1.2 | length 6.2
  F.Cu w0.254: D1.2 7.261,50.261 11.957,50.261 12.496,50.8 SW1.2
NetD2_2: D2.2 SW2.2 | length 7
  F.Cu w0.254: D2.2 26.568,50.311 27.019,50.762 32.116,50.762 SW2.2 SW2.2@32.304,50.65
NetD3_2: D3.2 SW3.2 | length 7
  F.Cu w0.254: D3.2 45.362,50.209 45.953,50.8 SW3.2
NetD4_2: D4.2 SW4.2 | length 6.6
  F.Cu w0.254: D4.2 7.186,30.933 7.509,31.256 7.509,31.704 7.657,31.852 13.002,31.852 SW4.2
NetD5_2: D5.2 SW5.2 | length 6
  F.Cu w0.254: D5.2 26.593,30.91 27.515,31.832 32.072,31.832 SW5.2
NetD6_2: D6.2 SW6.2 | length 6.2
  F.Cu w0.254: D6.2 45.387,30.785 46.352,31.75 SW6.2
NetD7_2: D7.2 SW7.2 | length 10.9
  F.Cu w0.254: D7.2 9.383,7.061 9.66,7.338 9.66,11.536 10.825,12.7 SW7.2
NetD8_2: D8.2 SW8.2 | length 10.3
  F.Cu w0.254: D8.2 31.368,7.569 32.154,8.355 SW8.2
NetD9_2: D9.2 SW9.2 | length 9.3
  F.Cu w0.254: D9.2 46.516,7.569 47.859,8.912 47.859,11.607 48.677,12.424 50.928,12.424 SW9.2
NetD10_2: D10.2 D11.4 | length 17
  F.Cu w0.254: D11.4 47.588,40.832 51.373,40.832 54.867,37.338 D10.2
NetD10_4: D10.4 R11.2 | length 31.9
  F.Cu w0.254: v1(66.978,43.666) 66.978,40.673 D10.4
  B.Cu w0.254: R11.2 54.546,64.017 66.978,51.585 v1(66.978,43.666)
NetD11_2: D11.2 D12.4 | length 16.4
  F.Cu w0.254: D12.4 36.343,40.513 39.518,37.338 D11.2
NetD12_2: D12.2 D13.4 | length 16
  F.Cu w0.254: D13.4 9.481,40.386 12.887,40.386 16.06,37.213 D12.2
NetD13_2: D13.2 D14.4 | length 15.5
  F.Cu w0.254: D13.2 5.204,22.611 5.611,22.204 D14.4
NetD14_2: D14.2 D15.4 | length 15.5
  F.Cu w0.254: D14.2 23.513,17.754 23.92,18.161 D15.4
NetD15_2: D15.2 D16.4 | length 16.8
  F.Cu w0.254: D15.2 36.534,21.461 39.834,18.161 D16.4
NetD16_2: D16.2 D17.4 | length 16.3
  F.Cu w0.254: D16.2 51.404,21.461 54.704,18.161 D17.4
NetDS1_1: DS1.1 R10.2 | length 1.2
  B.Cu w0.254: DS1.1@5.528,75.124 DS1.1 5.577,75.069 6.655,75.069 R10.2 R10.2@6.703,75.014
NetR2_2: R2.2 U1.3 | length 14.3
  F.Cu w0.254: U1.3 55.476,63.312 56.887,64.723 60.505,64.723 61,64.228 61,62.717 R2.2
OSCIN: C10.2 U2.5 Y1.1 | length 10.8
  B.Cu w0.254: U2.5 43.578,65.587 43.904,65.587 44.245,65.927 44.245,66.407 45.143,67.305 Y1.1 47.329,67.522 C10.2
OSCOUT: C11.2 U2.6 Y1.2 | length 15.9
  B.Cu w0.254: U2.6 44.078,65.118 44.699,65.739 44.699,66.219 44.858,66.378 48.454,66.378 48.686,66.61 48.686,68.431 49.41,69.155 52.424,69.155 ; Y1.2@52.424,67.806 52.424,69.155 ; Y1.2 Y1.2@52.426,67.806 ; C11.2 52.424,70.448 52.424,69.155
PA2: U2.12
PA3: U2.13
PA7: U2.17
PA8: U2.29
PA9_TX: U2.30
PA11: R9.1 U2.32 | length 2.3
  B.Cu w0.254: U2.32 43.578,54.897 43.843,54.632 43.843,53.682 R9.1
PA12: R7.1 R8.1 U2.33 | length 3.2
  B.Cu w0.254: R7.1 41.89,53.686 42.889,53.686 R8.1 42.902,53.677 42.902,54.473 43.078,54.648 U2.33
PA15: U2.38
PB3_SWO: U2.39
PB4: U2.40
PB5: U2.41
PB6: U2.42
PB8: U2.45
PB9: U2.46
PB12: U2.25
PB13: U2.26
PB14: U2.27
PB15: U2.28
PC13: U2.2
PC14: C13.2 U2.3 Y2.1 | length 8.1
  B.Cu w0.254: C13.2 39.546,68.511 39.546,68.036 39.393,67.883 39.393,67.052 Y2.1 38.917,66.577 38.917,65.568 39.167,65.318 40.666,65.318 41.041,64.943 42.265,64.943 42.576,64.632 42.576,63.843 U2.3
PC15: C14.2 U2.4 Y2.2 | length 5.9
  B.Cu w0.254: C14.2 41.182,68.473 41.182,67.017 41.61,66.589 41.61,65.547 41.76,65.397 42.453,65.397 43.076,64.774 43.076,63.843 U2.4
RESET: C12.2 P3.5 R4.1 U2.7 | length 47.8
  F.Cu w0.254: v1(44.311,67.503) 40.446,67.503 39.428,66.485 v1(39.428,64.401) 39.428,63.433 39.713,63.148 40.814,63.148 41.099,62.863 41.809,62.863 41.809,61.014 42.508,60.316 v1(44.328,60.316)
  B.Cu w0.254: P3.5 17.597,60.176 18.023,60.602 25.097,60.602 27.514,63.02 38.047,63.02 v1(39.428,64.401) ; R4.1@43.643,66.337 43.56,66.42 43.56,67.344 C12.2 43.417,67.497 44.306,67.497 v1(44.311,67.503) ; v1(44.328,60.316) 44.328,61.896 44.244,61.98 44.578,62.315 U2.7
RX_PA10: U2.31
SCL: P1.3 R5.1 U2.21 | length 71.4
  F.Cu w0.254: P1.3 6.014,66.499 6.162,66.35 6.162,55.75 6.995,54.917 23.803,54.917 24.348,54.372 37.306,54.372 37.851,54.917 39.424,54.917 39.425,54.916 53.686,54.916 53.984,55.214 53.984,57.175 53.722,57.437 v1(53.722,58.545)
  B.Cu w0.254: U2.21 50.057,58.566 50.347,58.856 R5.1 53.574,58.856 53.574,58.76 53.722,58.612 v1(53.722,58.545)
SDA: P1.4 R6.1 U2.22 | length 70.1
  F.Cu w0.254: P1.4 3.406,68.981 6.348,68.981 6.616,68.713 6.616,55.979 7.09,55.505 23.96,55.505 24.64,54.826 37.117,54.826 37.663,55.371 40.37,55.371 40.5,55.501 52.755,55.501 53.197,55.944 v1(53.197,56.937)
  B.Cu w0.254: U2.22 51.114,58.066 R6.1 52.793,57.652 53.16,57.285 53.16,56.974 v1(53.197,56.937)
SWCLK: P3.3 U2.37 | length 24.3
  B.Cu w0.254: P3.3 20.137,59.07 21.214,60.148 24.99,60.148 26.351,58.787 32.332,58.787 33.146,57.973 33.146,57.396 33.959,56.583 38.011,56.583 38.494,57.066 U2.37
SWDIO: P3.2 U2.34 | length 42.4
  B.Cu w0.254: P3.2 22.551,62.746 22.551,61.205 22.402,61.056 16.651,61.056 16.065,60.469 16.065,55.684 16.243,55.505 25.079,55.505 26.617,57.044 30.958,57.044 31.873,56.129 37.945,56.129 39.385,54.689 42.265,54.689 42.576,55 42.576,55.789 U2.34
pads on no net: D17.2 J1.4 J1.6 J1.7 J1.8 J1.9 J1.10 J1.11 SW1.3 SW1.6 SW1.Hole SW2.3 SW2.6 SW2.Hole SW3.3 SW3.6 SW3.Hole SW4.3 SW4.6 SW4.Hole SW5.3 SW5.6 SW5.Hole SW6.3 SW6.6 SW6.Hole SW7.3 SW7.6 SW7.Hole SW8.3 SW8.6 SW8.Hole SW9.3 SW9.6 SW9.Hole U3.4
copper on no net: | length 1.4
  B.Cu w0.254: 62.201,70.917 62.289,70.829 62.289,69.569

## Polygon pours and split planes (outlines as drawn)
+BATT on F.Cu "NONET_L-01_P-001" (solid, pour order 0): 0,90 70,90 70,0 0,0
GND on B.Cu "NONET_L-01_P-001" (solid, pour order 2): 70,0 70,90 0,90 0,0

## Keep-outs
Edge.Cuts:
  lines w0.05: 0,0 70,0 ; 0,0 0,90 ; 0,0 70,0 ; 0,0 0,90 ; 0,90 70,90 ; 0,90 70,90 ; 70,0 70,90 ; 70,0 70,90

## Silkscreen, mask and mechanical layers (free items; w line width, h text height)
F.SilkS:
  text "GND" at 9.474,87.403 h1.52
  text "VBUS" at 15.195,87.311 h1.52
  text "3V3" at 22.038,87.296 h1.52
  text "MIC_OUT" at 13.822,79.401 h1.52